# Altium PCB linkit-v4-0.3_6layers_kimonly.PcbDoc (part 3 of 5)
Units mm, origin at the board's own origin, x right, y up, seen from the top; angles counter-clockwise.
Board outline 70 x 35 mm, 6 copper layers (Top Layer, Int1 (GND), Int2 (Sign), Int3 (Sign), Int4 (PWR), Bottom Layer), stack 1.636 mm thick; 194 components, 149 nets, 738 pads, 717 vias.
Unrouted connection lines stored in the file: 1.
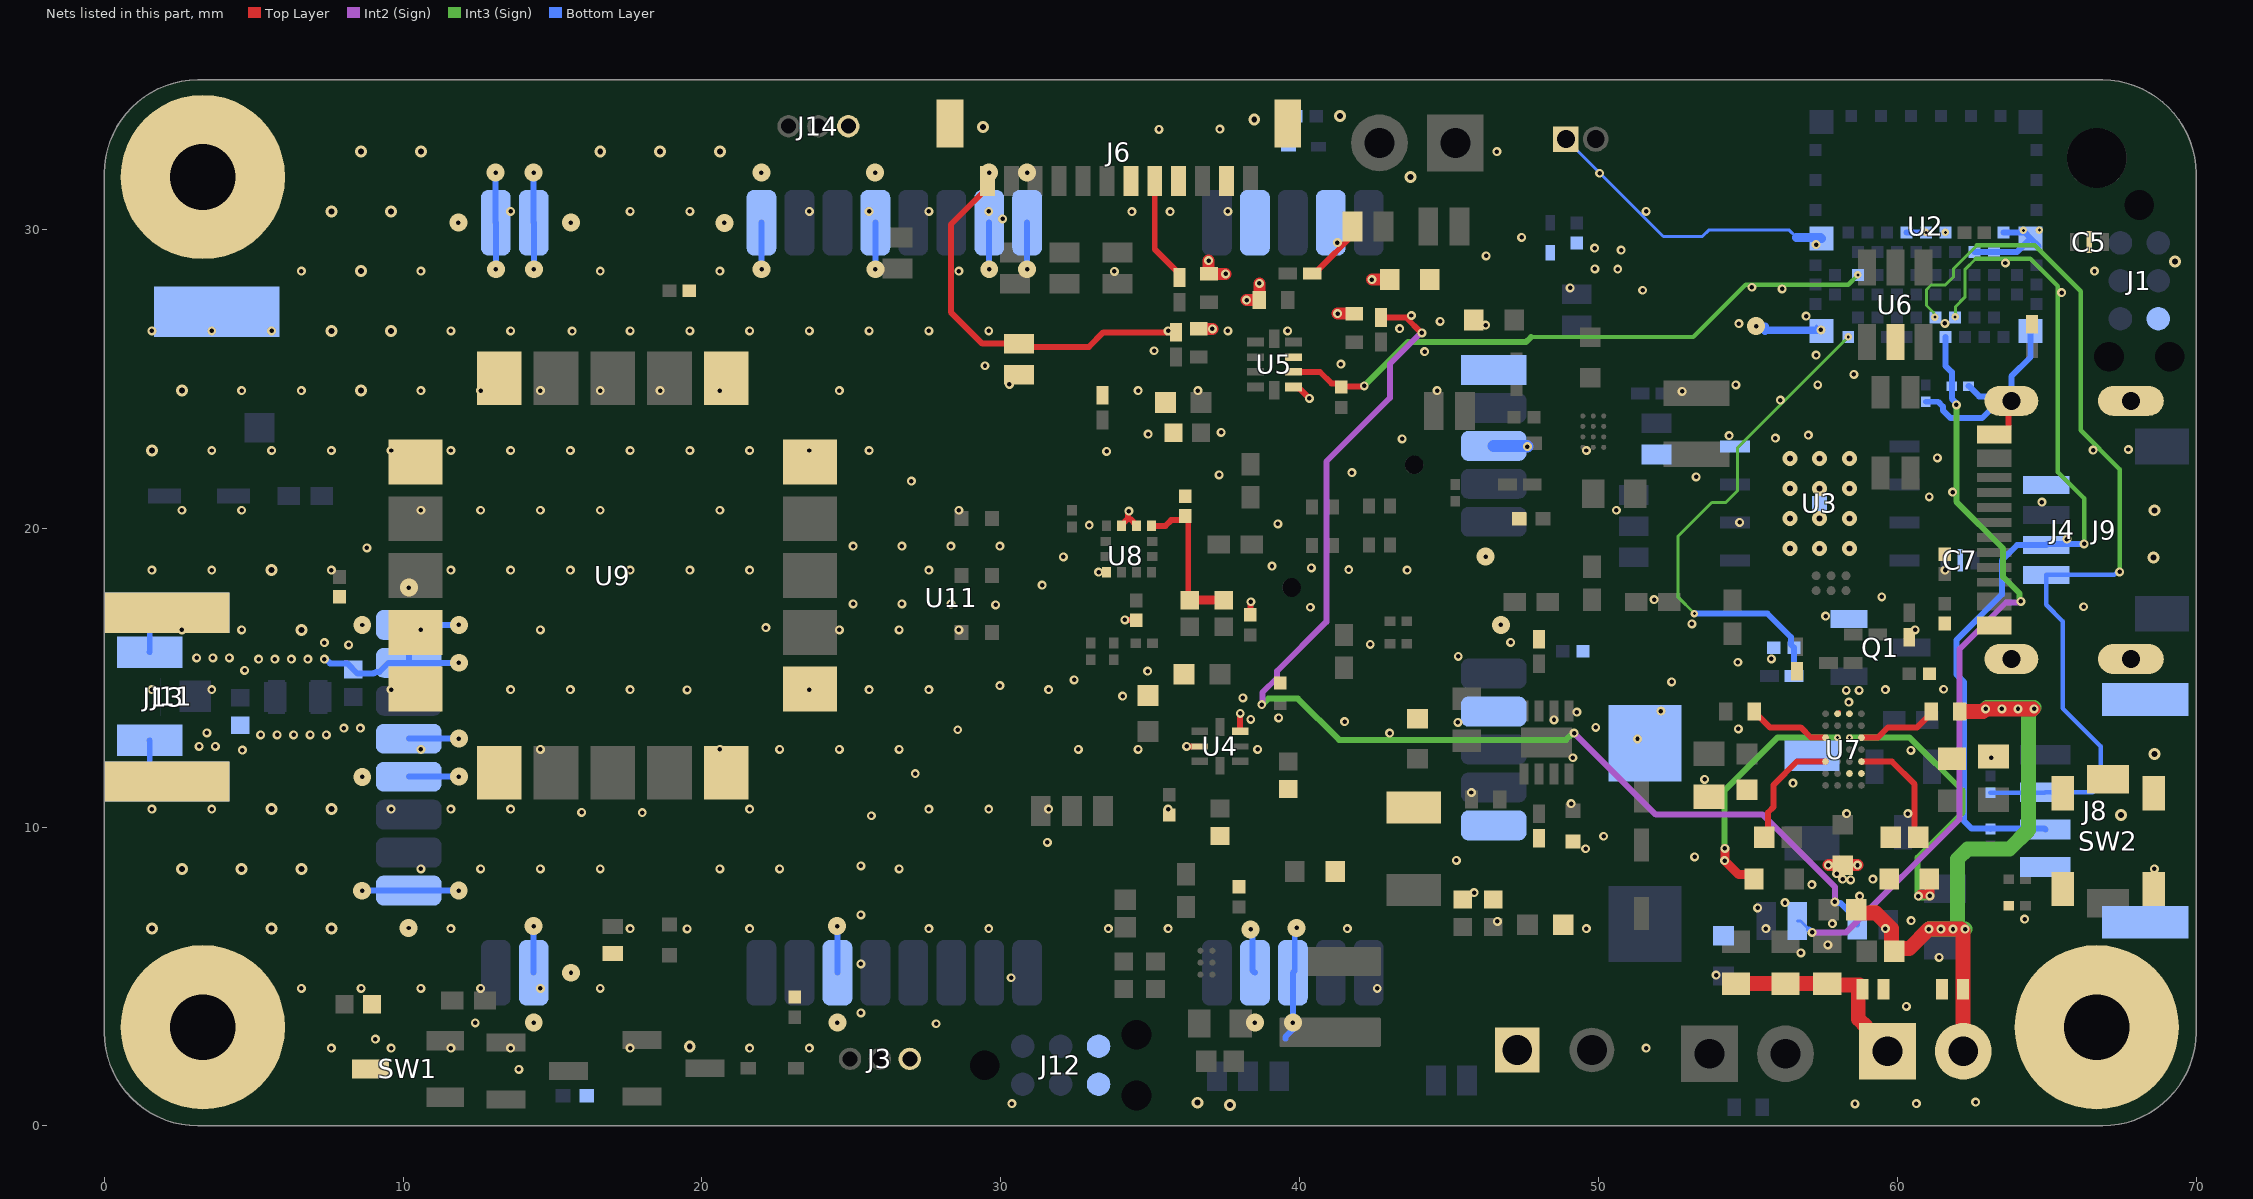
[diagram p6: the nets of this part, all layers, seen from the top]

## Part data (continued)
R26: library part RES-NC-0402, "Generic Resistor, Not Fitted", Manufacturer=YAGEO, Manufacturer_Part_Number=RC0402JR-070RL, Package=R0402, ComponentLink1Description=Datasheet, ComponentLink1URL=http://tunmcdsvn.tun.st.com/Component_Datasheet_Library/Trunk/Resistors/Yageo_Resistor_RC0402-series, Initial_Board_Reference=MB1274, Internal_Part_Number=MCD-00052, part_type=Resistor, Provided_By=SUBCO, status=Released
R31: library part "RES 0R 0402", "RES 0R 0402", Supplier Part Number 1=603-RC0402JR-070RL, Size=0402, Supplier 1=Mouser, Supplier 2=Digi-Key, Supplier Part Number 2=311-0.0JRCT-ND
R33 R34: "Thick Film Resistors - SMD 1/20watt 5.1Kohms 5% 200ppm", Manufacturer_Name=Vishay, Mouser Part Number=71-CRCW02015K10JNED, Datasheet Link=http://www.vishay.com/docs/20035/dcrcwe3.pdf, Height=0.28mm, Manufacturer_Part_Number=CRCW02015K10JNED, Mouser Price/Stock=https://www.mouser.com/Search/Refine.aspx?Keyword=71-CRCW02015K10JNED
R35: library part CRCW04020000Z0EEHP, "Thick Film Resistors - SMD CRCW 402 jumper", Manufacturer_Name=Vishay, Mouser Part Number=71-CRCW04020000Z0EEH, Arrow Part Number=CRCW04020000Z0EEHP, Arrow Price/Stock=https://www.arrow.com/en/products/crcw04020000z0eehp/vishay?utm_currency=USD&region=nac, Datasheet Link=http://www.vishay.com/docs/20035/dcrcwe3.pdf, Height=0.4mm, Manufacturer_Part_Number=CRCW04020000Z0EEHP, Mouser Price/Stock=https://www.mouser.co.uk/ProductDetail/Vishay-Dale/CRCW04020000Z0EEHP?qs=Imq1NPwxi74NTc567q7flQ%3D%3D
R36: "Res Thick Film 0201 453 Ohm 1% 1/20W ±100ppm/°C Molded SMD SMD Paper T/R", Case Code (Imperial)=0201, Case Code (Metric)=0603, Manufacturer="Vishay Dale", Manufacturer Part Number=CRCW0201453RFKED, Manufacturer_Name=Vishay, Max Operating Temperature=155°C, Max Power Dissipation=50mW, Min Operating Temperature=-55°C, Mouser Part Number=71-CRCW020120K0FKED, Package Quantity=10000, Supplier Part Number=71-CRCW0201453RFKED, Temperature Coefficient=100ppm/°C, TOLERANCE=1%, Voltage Rating=30V, Arrow Part Number=CRCW020120K0FKED, Arrow Price/Stock=https://www.arrow.com/en/products/crcw020120k0fked/vishay, Case/Package=0201, Category="Chip SMD Resistors", ComponentLink1Description=https://datasheet.ciiva.com/8935/crcw0201e3-8935846.pdf?src-supplier=Avnet, ComponentLink1URL=https://datasheet.ciiva.com/8935/crcw0201e3-8935846.pdf?src-supplier=Avnet, ComponentLink2Description=https://datasheet.ciiva.com/2580/crcw0201e3-2580478.pdf?src-supplier=Digikey, ComponentLink2URL=https://datasheet.ciiva.com/2580/crcw0201e3-2580478.pdf?src-supplier=Digikey, Contact Plating=Tin, Datasheet Link=http://www.vishay.com/docs/20035/dcrcwe3.pdf, Height=0.28mm, Lead Free="Lead Free", Length=0.024inch, Manufacturer_Part_Number=CRCW020120K0FKED, Mouser Price/Stock=https://www.mouser.co.uk/ProductDetail/Vishay-Dale/CRCW020120K0FKED?qs=1%252BOKmYoxJmkUY7PW7c9G2g%3D%3D, Number of Terminations=2, Packaging="Tape and Reel", Power Rating=50mW, Pricing="1=0,21, 10=0,091, 50=0,091, 100=0,063, 1000=0,043, 10000=0,029 (USD)", Radiation Hardening=No, RoHS=Yes, RoHS Compliant=Yes, Series=CRCW, Stock=8250, SUPPLIER=Mouser, Termination=SMD/SMT, Voltage Rating (DC)=30V, Weight=6E-06oz, Width=0.3mm
R37: "Thick Film Resistors - SMD 10 kOhms 50 mW 0201 1%", Manufacturer_Name=KEMET, Mouser Part Number=603-RC0201FR-7D10KL, Datasheet Link=http://www.yageo.com/documents/recent/PYu-RC0201_51_RoHS_L_8.pdf, Height=0.26mm, Manufacturer_Part_Number=RC0201FR-7D10KL, Mouser Price/Stock=https://www.mouser.co.uk/ProductDetail/YAGEO/RC0201FR-7D10KL?qs=F5EMLAvA7ICAEt2%2Fo%2FBSlA%3D%3D
R38: "Thick Film Resistors - SMD 0201 255ohm 1% HalogenFree AEC-Q200", Manufacturer_Name=Panasonic, Datasheet Link=https://industrial.panasonic.com/cdbs/www-data/pdf/RDA0000/AOA0000C301.pdf, Height=0.26mm, Manufacturer_Part_Number=ERJ-1GNF2550C
R39: "Thick Film Resistors - SMD 1/20watt 196ohms 1% 100ppm"
R40 R42: "Thick Film Resistors - SMD 1/20watt 470ohms 1% 200ppm", Manufacturer_Name=Panasonic, Mouser Part Number=667-ERJ-U02F4700X, Datasheet Link=https://industrial.panasonic.com/cdbs/www-data/pdf/RDP0000/AOA0000C334.pdf, Height=0.4mm, Manufacturer_Part_Number=ERJ-U02F4700X, Mouser Price/Stock=https://www.mouser.co.uk/ProductDetail/Panasonic/ERJ-U02F4700X?qs=CBysBIMljtjEviQOZxHkmQ%3D%3D
R41: "Thick Film Resistors - SMD 1/16watt 3.3Kohms 1% 100ppm", Manufacturer_Name=Vishay, Mouser Part Number=71-CRCW0402-3.3K-E3, Arrow Part Number=CRCW04023K30FKED, Arrow Price/Stock=https://www.arrow.com/en/products/crcw04023k30fked/vishay, Datasheet Link=http://www.vishay.com/docs/20035/dcrcwe3.pdf, Height=0.4mm, Manufacturer_Part_Number=CRCW04023K30FKED, Mouser Price/Stock=https://www.mouser.co.uk/ProductDetail/Vishay-Dale/CRCW04023K30FKED?qs=iv%252Be0Bc5VY2uvlCcTQHBWQ%3D%3D
R43 R44: "Thick Film Resistors - SMD 1/20watt 22ohms 1% 200ppm", Manufacturer_Name=Panasonic, Datasheet Link=https://industrial.panasonic.com/cdbs/www-data/pdf/RDP0000/AOA0000C334.pdf, Height=0.4mm, Manufacturer_Part_Number=ERJ-U02F22R0X
R45: "Thick Film Resistors - SMD 36.5Kohm 1% 200ppm", Manufacturer_Name=Vishay, Datasheet Link=http://www.vishay.com/docs/20035/dcrcwe3.pdf, Height=0.28mm, Manufacturer_Part_Number=CRCW020136K5FNED
R46: "Thick Film Resistors - SMD 0 Ohms 50mW 0201 1%", Manufacturer_Name=KEMET, Mouser Part Number=603-RC0201FR-070RL, Arrow Part Number=RC0201FR-070RL, Arrow Price/Stock=https://www.arrow.com/en/products/rc0201fr-070rl/yageo?region=nac, Datasheet Link=http://www.yageo.com/documents/recent/PYu-RC0201_51_RoHS_L_8.pdf, Height=0.26mm, Manufacturer_Part_Number=RC0201FR-070RL, Mouser Price/Stock=https://www.mouser.co.uk/ProductDetail/YAGEO/RC0201FR-070RL?qs=LWWr1WFOkdETHfAClQk8Xg%3D%3D
R47: "Thick Film Resistors - SMD 1/20W 2.74Kohms 1% 200ppm", Manufacturer_Name=Vishay, Datasheet Link=http://www.vishay.com/docs/20035/dcrcwe3.pdf, Height=0.28mm, Manufacturer_Part_Number=CRCW02012K74FNED
R48 R63: "Thick Film Resistors - SMD 1/20watt 100Kohms 5% 200ppm", Manufacturer_Name=Vishay, Mouser Part Number=71-CRCW0201100KJNED, Arrow Part Number=CRCW0201100KJNED, Arrow Price/Stock=https://www.arrow.com/en/products/crcw0201100kjned/vishay, Datasheet Link=http://www.vishay.com/docs/20035/dcrcwe3.pdf, Height=0.28mm, Manufacturer_Part_Number=CRCW0201100KJNED, Mouser Price/Stock=https://www.mouser.co.uk/ProductDetail/Vishay-Dale/CRCW0201100KJNED?qs=IQLUlsvFoXu8A8gHIw6owA%3D%3D
R49 R50: "Thick Film Resistors - SMD 1/16watt 49.9Kohms 1%", Manufacturer_Name=Vishay, Mouser Part Number=71-CRCW0402-49.9K-E3, Arrow Part Number=CRCW040249K9FKED, Arrow Price/Stock=https://www.arrow.com/en/products/crcw040249k9fked/vishay?region=nac, Datasheet Link=http://www.vishay.com/docs/20035/dcrcwe3.pdf, Height=0.4mm, Manufacturer_Part_Number=CRCW040249K9FKED, Mouser Price/Stock=https://www.mouser.co.uk/ProductDetail/Vishay-Dale/CRCW040249K9FKED?qs=hAuyw6LW%252BLhwjtjsHx%2FGDQ%3D%3D
R52 R53 R55: "Thick Film Resistors - SMD CRCW 402 jumper", Manufacturer_Name=Vishay, Mouser Part Number=71-CRCW04020000Z0EEH, Arrow Part Number=CRCW04020000Z0EEHP, Arrow Price/Stock=https://www.arrow.com/en/products/crcw04020000z0eehp/vishay?utm_currency=USD&region=nac, Datasheet Link=http://www.vishay.com/docs/20035/dcrcwe3.pdf, Height=0.4mm, Manufacturer_Part_Number=CRCW04020000Z0EEHP, Mouser Price/Stock=https://www.mouser.co.uk/ProductDetail/Vishay-Dale/CRCW04020000Z0EEHP?qs=Imq1NPwxi74NTc567q7flQ%3D%3D
R58: "Thick Film Resistors - SMD 10 MOhms 50mW 0201 1%", Manufacturer_Name=KEMET, Mouser Part Number=603-RC0201FR-0710ML, Arrow Part Number=RC0201FR-0710ML, Arrow Price/Stock=https://www.arrow.com/en/products/rc0201fr-0710ml/yageo, Datasheet Link=http://www.yageo.com/documents/recent/PYu-RC0201_51_RoHS_L_8.pdf, Height=0.26mm, Manufacturer_Part_Number=RC0201FR-0710ML, Mouser Price/Stock=https://www.mouser.com/Search/Refine.aspx?Keyword=603-RC0201FR-0710ML
SW1: "Board Mount Hall Effect/Magnetic Sensors Integrated Digital Omnipolar, TMR, High Sensitivity Magnetic Switch, SOT23 Package, Ind Temp, 2Hz", Manufacturer_Name="Allegro MicroSystems", Mouser Part Number=462-CT8132BV-IS3, Datasheet Link=https://www.mouser.fr/datasheet/2/1115/Allegro_DS_CT813x_Datasheet_GS_FINAL_R2_v2-3441103.pdf, Height=1.4mm, Manufacturer_Part_Number=CT8132BV-IS3, Mouser Price/Stock=https://www.mouser.fr/ProductDetail/Allegro-MicroSystems/CT8132BV-IS3?qs=GBLSl2Akirsc7cUAudCqXg%3D%3D
SW2: "SW SPST PB 50MA 12V SMT CK variant", Manufacturer=C&K, Manufacturers Part Number="PTS820J2xM SMTR LFS", Supplier Part Number 1=611-PTS820J25MSMTR, Distributor 1=EBV, Distributor 2="Future Electronics", Supplier 1=Mouser, Supplier 2=Digi-Key, Supplier Part Number 2=CKN10505CT-ND
U1: "Battery Management 800-mA linear batter y charger for one-ce", Manufacturer_Name="Texas Instruments", Mouser Part Number=595-BQ25176MDSGR, Arrow Part Number=BQ25176MDSGR, Arrow Price/Stock=https://www.arrow.com/en/products/bq25176mdsgr/texas-instruments?region=nac, Datasheet Link=https://www.ti.com/lit/gpn/bq25176m, Height=0.8mm, Manufacturer_Part_Number=BQ25176MDSGR, Mouser Price/Stock=https://www.mouser.co.uk/ProductDetail/Texas-Instruments/BQ25176MDSGR?qs=Y0Uzf4wQF3nVhcdITj52nA%3D%3D
U2: "IC ISP Smart Bluetooth Module", Manufacturer=InsightSIP, Manufacturers Part Number=ISP1807-LR-ST, Temp Max=85, Temp Min=-40, Supplier 1=Rutronik, Supplier 2=Mouser, Supplier Part Number 1=ISP1807-LR-ST, Supplier Part Number 2=359-ISP1807-LR-ST, Supplier Unit Price 1=8.5
U3: "IC MEM SERIAL NOR FLASH QSPI 128Mb/16MB 3.6V 166MHz WSON8 6X5", Manufacturer=ISSI, Supplier Part Number 1=2901145, Temp Max=105, Temp Min=-40, Distributor 1=EBV, Distributor 2="Future Electronics", Manufacturers Part Number=IS25LP128F-JKLE, Supplier 1=Farnell, Supplier 2=Mouser, Supplier Part Number 2=870-IS25LP128FJKLETR
U4: "Power Switch ICs - Power Distribution Low Input VTG Dual L oad Switch", Manufacturer_Name="Texas Instruments", Mouser Part Number=595-TPS22960RSER, Arrow Part Number=TPS22960RSER, Arrow Price/Stock=https://www.arrow.com/en/products/tps22960rser/texas-instruments?region=nac, Datasheet Link=https://www.ti.com/lit/ds/symlink/tps22960.pdf?ts=1638681846865&ref_url=https%253A%252F%252Fwww.google.com%252F, Height=0.6mm, Manufacturer_Part_Number=TPS22960RSER, Mouser Price/Stock=https://www.mouser.co.uk/ProductDetail/Texas-Instruments/TPS22960RSER?qs=EQxOuqCyzqQpKHLEcq5RSg%3D%3D
U5: "Analog to Digital Converters - ADC 16B ADC w/ Int MUX P GA Comp Osc & Ref A", Manufacturer_Name="Texas Instruments", Mouser Part Number=595-ADS1115IRUGR, Arrow Part Number=ADS1115IRUGR, Arrow Price/Stock=https://www.arrow.com/en/products/ads1115irugr/texas-instruments?utm_currency=USD&region=nac, Datasheet Link=https://www.ti.com/lit/ds/symlink/ads1115.pdf?ts=1601235703022&ref_url=https%253A%252F%252Fwww.ti.com%252Fproduct%252FADS1115%253FkeyMatch%253DADS1115IRUGR%2526tisearch%253DSearch-EN-everything%2526usecase%253DOPN, Height=0.4mm, Manufacturer_Part_Number=ADS1115IRUGR, Mouser Price/Stock=https://www.mouser.co.uk/ProductDetail/Texas-Instruments/ADS1115IRUGR?qs=IK5e5L0zOXhqw%2F8AHSSbuA%3D%3D
U6: "ESD Suppressors / TVS Diodes High Speed Interface Protection Low Cap", Manufacturer_Name=STMicroelectronics, Mouser Part Number=511-USBLC6-2SC6, Arrow Part Number=USBLC6-2SC6, Arrow Price/Stock=https://www.arrow.com/en/products/usblc6-2sc6/stmicroelectronics?utm_currency=USD&region=europe, Datasheet Link=http://www.st.com/st-web-ui/static/active/en/resource/technical/document/datasheet/CD00050750.pdf, Height=1.45mm, Manufacturer_Part_Number=USBLC6-2SC6, Mouser Price/Stock=https://www.mouser.co.uk/ProductDetail/STMicroelectronics/USBLC6-2SC6?qs=po45yt2pPpu%2FhNIlwQdTlg%3D%3D
U7: "Wireless Charging ICs Wireless Pwr Receivr A 595-BQ51003YFPR", Manufacturer_Name="Texas Instruments", Mouser Part Number=595-BQ51003YFPT, Arrow Part Number=BQ51003YFPT, Arrow Price/Stock=https://www.arrow.com/en/products/bq51003yfpt/texas-instruments?region=nac, Datasheet Link=http://www.ti.com/lit/gpn/BQ51003, Height=0.5mm, Manufacturer_Part_Number=BQ51003YFPT, Mouser Price/Stock=https://www.mouser.co.uk/ProductDetail/Texas-Instruments/BQ51003YFPT?qs=QCUnHQQYO1rX6GZ4rUhwCg%3D%3D
U8: "IC AXL Accel/temp SPI/I2C 12LGA", Manufacturer="Bosch Sensortec", Supplier Part Number 1=828-1081-1-ND, Temp Max=85, Temp Min=-40, Manufacturers Part Number=BMA400, Supplier 1=Digi-Key, Supplier 2=Mouser, Supplier Part Number 2=262-BMA400
U9: "GNSS / GPS Modules u-blox M10 GNSS antenna module ROM, TCXO, SAW, LNA LGA, 16x16 mm", Manufacturer_Name=U-Blox, Mouser Part Number=377-SAM-M10Q-00B, Datasheet Link=https://content.u-blox.com/sites/default/files/documents/SAM-M10Q_DataSheet_UBX-22013293.pdf, Height=6.8mm, Manufacturer_Part_Number=SAM-M10Q-00B, Mouser Price/Stock=https://www.mouser.co.uk/ProductDetail/u-blox/SAM-M10Q-00B?qs=vvQtp7zwQdOaA6LplTUKjg%3D%3D
U10: "Switching Voltage Regulators 5.5-V buck-boost con verter with 75-nA op", Manufacturer_Name="Texas Instruments", Mouser Part Number=595-TPS63901YCJR, Arrow Part Number=TPS63901YCJR, Arrow Price/Stock=https://www.arrow.com/en/products/tps63901ycjr/texas-instruments?region=nac, Datasheet Link=https://www.ti.com/lit/ds/symlink/tps63901.pdf?ts=1658737279065&ref_url=https%253A%252F%252Fwww.ti.com%252Fproduct%252FTPS63901%253FkeyMatch%253DTPS63901YCJR%2526tisearch%253Dsearch-everything%2526usecase%253DOPN, Height=0.35mm, Manufacturer_Part_Number=TPS63901YCJR, Mouser Price/Stock=https://www.mouser.co.uk/ProductDetail/Texas-Instruments/TPS63901YCJR?qs=vvQtp7zwQdNZy3FE2e2hqg%3D%3D
U11: "KIM2 Module 48 pins 1.27mm pitch 36.6 x 25.4 x 5mm", Manufacturer=Kineis, Rating=3.3-5V, TOLERANCE="-30 /  +55°C", BOI="SMD48 36.6x25.4x5mm", DESIG="KIMFLEX Module 48 pins 1.27mm pitch 36.6 x 25.4 x 5mm", K P/N=-, Manufacturer P/N=KIM2, SUPPLIER=Kineis, Supplier P/N=KIMFLEX, VAL=KIM2
U14: "Switching Voltage Regulators 95-nA low IQ 5.5-V b oost converter with INLIMIT (1.9A)", Manufacturer_Name="Texas Instruments", Mouser Part Number=595-TPS612997YBHR, Arrow Part Number=TPS612997YBHR, Arrow Price/Stock=https://www.arrow.com/en/products/tps612997ybhr/texas-instruments?utm_currency=USD&region=nac, Datasheet Link=https://www.ti.com/lit/gpn/tps61299, Height=0.4mm, Manufacturer_Part_Number=TPS612997YBHR, Mouser Price/Stock=https://www.mouser.co.uk/ProductDetail/Texas-Instruments/TPS612997YBHR?qs=mELouGlnn3dLhnQxUdz5hw%3D%3D

## Via types
v1: diameter 0.3, hole 0.15, Int1 (GND) to Int3 (Sign), tented both sides, 165 vias
v2: diameter 0.3, hole 0.15, Top Layer to Int1 (GND), tented both sides, 113 vias
v3: diameter 0.3, hole 0.15, Top Layer to Int4 (PWR), tented both sides, 69 vias
v4: diameter 0.3, hole 0.15, Top Layer to Int3 (Sign), tented both sides, 64 vias
v5: diameter 0.3, hole 0.15, Int1 (GND) to Int2 (Sign), tented both sides, 39 vias
v6: diameter 0.6, hole 0.15, Int1 (GND) to Bottom Layer, tented both sides, 35 vias
v7: diameter 0.4/0.4/0.4/0.4 (per signal layer), hole 0.2, Top Layer to Bottom Layer, tented both sides, 31 vias
v8: diameter 0.3, hole 0.15, Int1 (GND) to Bottom Layer, tented both sides, 28 vias
v9: diameter 0.3, hole 0.15, Top Layer to Int2 (Sign), tented both sides, 21 vias
v10: diameter 0.3, hole 0.15, Int3 (Sign) to Bottom Layer, tented both sides, 20 vias
v11: diameter 0.3, hole 0.15, Int2 (Sign) to Int3 (Sign), tented both sides, 18 vias
v12: diameter 0.3, hole 0.15, Int4 (PWR) to Bottom Layer, tented both sides, 16 vias
v13: diameter 0.3, hole 0.15, Int2 (Sign) to Bottom Layer, tented both sides, 15 vias
v14: diameter 0.25, hole 0.1, Int3 (Sign) to Bottom Layer, tented both sides, 15 vias
v15: diameter 0.5, hole 0.2, Top Layer to Bottom Layer, tented both sides, 12 vias
v16: diameter 0.25, hole 0.1, Int2 (Sign) to Bottom Layer, tented both sides, 12 vias
v17: diameter 0.25, hole 0.1, Top Layer to Bottom Layer, tented both sides, 8 vias
v18: diameter 0.2, hole 0.1, Int2 (Sign) to Bottom Layer, tented both sides, 7 vias
v19: diameter 0.226, hole 0.1, Top Layer to Int3 (Sign), tented both sides, 6 vias
v20: diameter 0.4, hole 0.2, Top Layer to Bottom Layer, tented both sides, 6 vias
v21: diameter 0.6, hole 0.3, Top Layer to Bottom Layer, tented both sides, 4 vias
v22: diameter 0.25, hole 0.1, Int1 (GND) to Bottom Layer, tented both sides, 4 vias
v23: diameter 0.6, hole 0.15, Top Layer to Int2 (Sign), tented both sides, 2 vias
v24: diameter 0.6, hole 0.15, Int3 (Sign) to Bottom Layer, tented both sides, 2 vias
v25: diameter 0.3, hole 0.15, Top Layer to Bottom Layer, tented both sides, 2 vias
v26: diameter 0.6, hole 0.15, Int4 (PWR) to Bottom Layer, tented both sides, 1 vias
v27: diameter 0.25, hole 0.1, Int2 (Sign) to Int3 (Sign), tented both sides, 1 vias
v28: diameter 0.169, hole 0.1, Top Layer to Int2 (Sign), tented both sides, 1 vias

## Nets (pads, with @x,y where several pads share a name; then routed paths per layer and width w, separated by ;. In a path a pad name is that pad's centre, name@x,y a point inside that pad or via, vN(x,y) a via of type N, cw(c..) or ccw(c..) an arc to the next point about the centre after c; other vN are vias at no path point)
ADC0: O7.2 R27.1 | length 40
  Top Layer w0.2: R27.1@42.718,27.052 43.56,27.052 44.077,26.535 v9(44.09,26.535)
  Int2 (Sign) w0.2: v11(38.735,14.097) 38.754,14.116 38.754,14.5 39.243,14.989 39.243,15.216 40.894,16.867 40.894,22.232 43.019,24.357 43.019,25.493 44.061,26.535 v9(44.09,26.535) ; v11(49.19,13.144) 51.92,10.414 55.497,10.414 57.912,7.999 v13(57.912,7.493)
  Int3 (Sign) w0.2: v11(38.735,14.097) 38.75,14.097 38.952,14.299 39.942,14.299 41.322,12.919 48.911,12.919 49.136,13.144 v11(49.19,13.144)
  Bottom Layer w0.2: v13(57.912,7.493) 57.95,7.455 58.107,7.455 58.661,6.901 O7.2@58.661,6.731
ADC1: O8.2 R30.1 | length 2.2
  Top Layer w0.2: R30.1@40.428,28.522 40.541,28.522 40.641,28.622 40.641,28.664 41.77,29.794 O8.2@41.77,30.099
ADC2: J6.5 R32.1 | length 3.6
  Top Layer w0.2: J6.5@35.154,31.623 35.154,29.332 35.987,28.499 R32.1@35.987,28.387
ADC3: J6.12 O13.2 R51.1 | length 13.1
  Top Layer w0.2: J6.12@29.554,31.623 29.554,31.373 29.404,31.223 29.392,31.223 28.33,30.161 28.33,27.229 29.384,26.175 O13.2@30.607,26.175 30.712,26.07 32.954,26.07 33.436,26.552 R51.1@35.864,26.552
ADC_ALERT_RDY: R28.2 U2.64 U5.2 | length 20.7
  Top Layer w0.2: U5.2@39.797,25.228 40.685,25.228 41.069,24.844 41.292,24.844 R28.2@41.402,24.734 ; R28.2@41.402,24.724 R28.2@41.402,24.734 ; v4(42.164,24.765) 42.143,24.744 41.413,24.744 R28.2@41.402,24.734
  Int3 (Sign) w0.15: 47.747,26.398 53.173,26.398 54.924,28.149 58.36,28.149 v14(58.685,28.474)
  Int3 (Sign) w0.2: v4(42.164,24.765) 43.622,26.223 47.572,26.223 47.747,26.398
AGND: C14.2 C15.2 C16.2 C57.2 FB1.1 | length 3.6
  Top Layer w0.4: C57.2@36.626,26.678 36.634,26.67 v2(37.084,26.67) ; v2(36.957,28.956) 36.957,28.523 C16.2@36.967,28.513 v2(37.524,28.513) ; v2(38.227,27.633) C15.2@38.654,27.633 v2(38.654,28.194) ; v2(41.275,27.178) C14.2@41.829,27.178 ; v2(42.418,28.321) FB1.1@43.013,28.321
BAT_AN: C4.2 O5.2 U2.38 | length 25.4
  Int2 (Sign) w0.2: v13(57.15,6.477) 58.293,6.477 62.086,10.27 62.086,15.959 63.64,17.513 64.095,17.513 v11(64.133,17.551)
  Int3 (Sign) w0.2: v10(61.976,24.13) 61.976,20.886 63.541,19.321 63.541,18.367 64.095,17.813 64.095,17.589 v11(64.133,17.551)
  Bottom Layer w0.1: O5.2@56.655,6.858 56.769,6.858 v13@57.047,6.58
  Bottom Layer w0.2: v13@57.047,6.58 v13(57.15,6.477) ; U2.38@61.61,26.399 61.61,25.436 61.824,25.222 C4.2@61.824,24.752 61.824,24.336 61.976,24.184 v10(61.976,24.13)
BAT_READ_EN: R3.2 R22.2 U2.48 | length 17
  Int3 (Sign) w0.1: v14(53.213,17.145) 52.655,17.703 52.655,19.722 53.794,20.861 54.262,20.861 54.65,21.249 54.65,22.689 57.706,25.745 v14(58.36,26.399)
  Bottom Layer w0.2: v14(53.213,17.145) 55.654,17.145 56.44,16.359 56.44,16.108 R22.2@56.546,16.002 R3.2@56.546,15.047
BMA_PWR: C37.2 R29.1 R31.2 U8.7 | length 5.4
  Top Layer w0.2: U8.7@35.04,20.079 35.515,20.079 35.705,20.269 36.015,20.269 36.025,20.279 36.069,20.279 C37.2@36.147,20.357 ; C37.2@36.137,20.367 C37.2@36.147,20.357 ; C37.2@36.179,20.409 C37.2@36.179,20.389 ; R29.1@36.234,17.683 R29.1@36.275,17.642 ; R29.1@36.322,17.595 R29.1@36.275,17.642 ; C37.2@36.147,20.357 C37.2@36.179,20.389 ; C37.2@36.147,20.357 C37.2@36.179,20.325 ; C37.2@36.179,20.325 36.275,20.229 R29.1@36.275,17.642 ; C37.2@36.179,20.325 C37.2@36.179,20.389
  Top Layer w0.3: R29.1@36.322,17.595 R31.2@37.465,17.595
BOOT1: C29.2 U7.C4 | length 4
  Top Layer w0.2: C29.2@55.547,9.652 55.674,9.779 55.674,10.487 55.865,10.678 55.865,11.415 56.642,12.192 U7.C4@57.601,12.192
BOOT2: C34.2 U7.C1 | length 4.1
  Top Layer w0.2: U7.C1@58.801,12.192 59.817,12.192 60.582,11.427 C34.2@60.582,9.438
CLAMP1: C23.2 U7.E3 | length 8.5
  Top Layer w0.3: v4(54.234,9.285) 54.23,9.28 54.23,8.884 v4(54.226,8.879) 54.697,8.408 55.052,8.408 C23.2@55.205,8.255
  Int3 (Sign) w0.2: v4(54.226,8.879) 54.226,11.23 55.988,12.992 v19(58.001,12.992)
CLAMP2: C36.2 U7.E2 | length 10.1
  Top Layer w0.2: C36.2@61.076,8.255 C36.2@61.09,8.241
  Top Layer w0.3: v4(60.706,7.688) 60.779,7.761 61.028,7.761 v4(61.09,7.698) 61.09,7.827 C36.2@61.09,8.241
  Int3 (Sign) w0.2: v19(58.401,12.992) 60.414,12.992 62.184,11.222 62.184,10.48 60.679,8.975 60.679,7.742 60.706,7.715 v4(60.706,7.688) v4@60.712,7.693 ; v4@61.085,7.693 v4(61.09,7.698)
  Int3 (Sign) w0.3: v4@60.712,7.693 v4@61.085,7.693
COIL-1: C24.1 C28.1 C43.1 D9.1 J7.1 | length 6.3
  Top Layer w0.5: C43.1@54.61,4.761 C24.1@56.261,4.761 C28.1@57.277,4.761 ; C28.1@57.658,4.761 57.702,4.717 D9.1@58.737,4.717 ; D9.1@58.695,4.599 58.695,3.581 58.97,3.307 58.97,3.199 J7.1@59.67,2.499
COIL-2: C32.1 C33.1 C34.1 C35.1 C36.1 D10.1 J7.2 U7.B1 U7.B2 | length 23.4
  Top Layer w0.5: C32.1@58.626,7.239 58.626,7.224 58.721,7.129 59.282,7.129 59.801,6.61 59.801,5.937 C33.1@59.896,5.842 59.912,5.826 59.912,5.853 59.991,5.932 60.401,5.932 v4(61.055,6.586) ; v4@61.18,6.594 v4@61.453,6.594 ; v4(61.46,6.586) v4(61.865,6.586) 62.142,6.586 62.193,6.535 D10.1@62.193,4.572 J7.2@62.193,2.515 ; C35.1@62.14,13.862 62.866,13.862 v4(62.96,13.956) v4(63.5,13.956) v4(64.04,13.956) v4@64.537,13.956
  Int3 (Sign) w0.5: v4(61.055,6.586) v4(61.46,6.586) 61.831,6.586 v4(61.865,6.586) ; v4(62.27,6.586) v4(61.865,6.586) ; v4@63.003,13.998 64.58,13.998 64.389,13.808 64.389,9.899 63.751,9.262 62.348,9.262 62.011,8.925 62.011,6.732 v4(61.865,6.586)
  other v4: 64.58,13.956
COMM1: C25.2 U7.E4 | length 2.7
  Top Layer w0.2: C25.2@55.212,13.862 55.739,13.335 56.769,13.335 57.112,12.992 U7.E4@57.601,12.992
COMM2: C35.2 U7.E1 | length 2.7
  Top Layer w0.2: U7.E1@58.801,12.992 59.347,12.992 59.69,13.335 60.663,13.335 C35.2@61.19,13.862
EXT_SCL: J8.2 J9.4 R62.2 U2.39 | length 31.6
  Int3 (Sign) w0.1: v14(61.261,27.06) 61.232,27.089 61.232,27.198 60.976,27.455 60.976,27.982 61.13,28.136 61.609,28.136 61.884,28.411 61.884,28.684 62.664,29.464
  Int3 (Sign) w0.15: 62.664,29.464 64.603,29.464 66.135,27.932 66.135,23.273 67.437,21.971 v10(67.437,18.542)
  Bottom Layer w0.15: R62.2@63.119,11.15 64.936,11.15 J8.2@64.952,11.166 66.538,11.166 66.802,11.43 66.802,12.7 65.532,13.97 65.532,16.891 64.987,17.436 J9.4@64.987,18.439 67.266,18.439 67.369,18.542 v10(67.437,18.542)
EXT_SDA: J8.3 J9.3 R61.1 U2.37 | length 29.6
  Int3 (Sign) w0.1: v14@61.954,27.093 61.954,27.419 62.259,27.724 62.259,28.65 62.632,29.023
  Int3 (Sign) w0.15: v14(61.935,27.074) v14@61.954,27.093 ; 62.632,29.023 64.449,29.023 65.376,28.096 65.376,21.873 66.249,21 v10(66.249,19.478)
  Bottom Layer w0.2: R61.1@63.106,9.945 62.492,9.945 62.238,10.198 62.238,14.851 61.976,15.113 61.976,16.256 63.5,17.78 63.5,18.923 64.008,19.431 64.979,19.431 J9.3@64.987,19.439 65.026,19.478 v10(66.249,19.478) ; R61.1@63.119,9.932 63.132,9.945 64.923,9.945 J8.3@64.952,9.916
GND: BT1.- C1.2 C3.1 C4.1 C5.3 C6.1 C7.3 C8.2 C9.1 C10.2 C11.1 C12.1 C13.2 C17.1 C18.1 C19.1 C20.2 C21.2 C22.2 C26.2 C27.2 C30.2 C31.2 C37.1 C38.1 C39.2 C40.1 C47.1 C49.1 C50.2 D7.2 D8.2 D9.2 D10.2 FB1.2 FB2.2 FB3.2 FB4.2 FB5.2 FB6.2 J1.5 J2.1 J3.1 J4.A1_B12 J4.B1_A12 J4.SHIELD J5.1 J6.2 J6.4 J6.6 J6.13 J6.14 J8.4 J8.MP1 J8.MP2 J9.1 J11.1 J11.2 J12.5 J12.6 J13.2 J14.1 MH2.1 MH3.1 MH4.1 O11.1 O13.1 Q1.2 R6.2 R7.1 R8.1 R10.1 R11.1 R12.1 R18.1 R19.1 R20.1 R21.1 R22.1 R26.1 R33.1 R34.1 R37.2 R39.2 R57.1 R58.1 R59.2 R60.2 R63.2 SW1.3 SW2.1 SW2.G1 SW2.G2 SW2.G3 SW2.G4 U2.1 U2.7 U2.14 U2.16 U2.18 U2.21 U2.23 U2.24 U2.25 U2.31 U3.4 U3.9 U4.3 U4.6 U5.1 U5.3 U6.2 U7.G2 U7.G3 U8.1 U8.8 U8.9 U9.1 U9.4 U9.5 U9.6 U9.10 U9.11 U9.15 U9.16 U9.20 U11.1@46.495,25.294 U11.3@46.495,22.754 U11.7@46.495,13.864 U11.10@46.495,10.054 U11.13@39.775,5.124 U11.14@38.505,5.124 U11.21@24.535,5.124 U11.24@14.375,5.124 U11.26@10.195,7.874 U11.29@10.195,11.684 U11.30@10.195,12.954 U11.32@10.195,15.494 U11.33@10.195,16.764 U11.34@13.105,30.224 U11.35@14.375,30.224 U11.36@21.995,30.224 U11.39@25.805,30.224 U11.42@29.615,30.224 U11.43@30.885,30.224 U11.45@38.505,30.224 U11.47@41.045,30.224 | length 70.8
  Top Layer w0.1: U7.G3@58.001,13.792 U7.G3@58.068,13.859
  Top Layer w0.192: U8.1@33.536,18.529 U8.1@33.54,18.529
  Top Layer w0.2: v2(33.274,18.529) U8.1@33.536,18.529 ; U8.9@34.04,20.079 34.04,20.104 34.252,20.316 34.252,20.536 v2(34.29,20.574) ; v2(34.157,16.936) 34.164,16.929 34.53,16.929 C38.1@34.537,16.922 ; 34.328,20.316 34.54,20.104 U8.8@34.54,20.079 ; v2(36.223,12.7) U4.6@36.663,12.7 ; U4.3@38.013,13.2 U4.3@38.013,13.2 38.014,13.805 v2(38.016,13.806) ; R18.1@38.354,17.104 38.361,17.111 38.361,17.532 v2(38.367,17.539) ; U5.1@39.797,24.728 39.935,24.728 39.999,24.664 40.009,24.664 v2(40.327,24.345) ; J4.B1_A12@63.243,23.141 63.518,23.141 63.718,23.341 63.718,24.161 J4.SHIELD@63.818,24.261
  Top Layer w0.4: v2(57.692,8.727) FB2.2@58.175,8.727 v2(58.669,8.727)
  Bottom Layer w0.1: J2.1@48.911,33.02 52.17,29.761 53.477,29.761 53.689,29.972 56.387,29.972 56.626,29.733 ; U2.1@57.297,26.762 U2.1@57.46,26.599
  Bottom Layer w0.2: J11.1@1.524,12.902 1.525,12.901 1.525,12.101 J13.2@2.1,11.526 ; J11.2@1.524,15.852 J11.2@1.524,15.852 1.525,16.601 J13.2@2.1,17.176 ; v8(7.366,15.621) 7.42,15.621 7.564,15.477 8.132,15.477 8.475,15.134 9.015,15.134 9.055,15.174 9.078,15.174 9.09,15.187 9.206,15.187 9.514,15.494 U11.32@10.195,15.494 U11.33@10.195,16.764 ; v6@8.635,7.871 U11.26@10.192,7.871 ; U11.26@10.195,7.874 v6(11.865,7.874) ; U11.29@10.198,11.687 v6(11.868,11.687) ; U11.30@10.198,12.957 v6(11.868,12.957) ; U11.32@10.198,15.497 v6(11.868,15.497) ; U11.33@10.198,16.767 v6(11.868,16.767) ; U11.34@13.102,30.227 v6(13.102,31.897) ; U11.34@13.105,30.224 13.106,30.222 13.106,28.665 v6(13.108,28.664) ; U11.24@14.372,5.127 v6@14.372,6.684 ; U11.35@14.372,30.227 v6(14.372,31.897) ; U11.35@14.375,30.224 14.376,30.222 14.376,28.665 v6(14.378,28.664) ; v6@21.995,28.667 U11.36@21.995,30.224 ; U11.21@24.532,5.127 v6@24.532,6.684 ; v6@25.805,28.667 U11.39@25.805,30.224 ; v6@29.615,28.667 U11.42@29.615,30.224 ; v6@30.885,28.667 U11.43@30.885,30.224 ; v6(38.36,6.575) 38.433,6.503 38.433,5.196 U11.14@38.502,5.127 ; 39.529,2.927 39.529,2.981 39.775,3.226 U11.13@39.775,5.124 39.839,5.188 39.839,6.56 v6(39.904,6.624) ; U11.3@46.484,22.744 U11.3@46.495,22.754 ; U2.14@60.31,29.899 v17(60.96,29.899) ; C3.1@60.96,24.231 61.367,24.231 61.526,24.072 61.526,23.944 61.79,23.68 62.837,23.68 63.418,24.261 J4.SHIELD@63.818,24.261 ; C4.1@62.384,24.752 62.404,24.752 62.742,24.414 63.665,24.414 J4.SHIELD@63.818,24.261 ; U2.21@62.585,29.249 U2.23@63.235,29.249 64.01,29.249 U2.25@64.46,29.699 ; U2.24@63.56,29.899 64.26,29.899 U2.25@64.46,29.699 ; U2.31@64.46,26.599 64.46,25.725 63.818,25.083 J4.SHIELD@63.818,24.261 ; U2.25@64.73,29.429 U2.25@64.46,29.699
  Bottom Layer w0.254: 55.575,26.599 55.412,26.762 v6(55.276,26.762) v6@55.575,26.762 ; 55.575,26.628 U2.1@57.431,26.628
  Bottom Layer w0.3: 56.626,29.733 57.425,29.733 U2.7@57.46,29.699
  Bottom Layer w0.4: U11.3@46.495,22.754 47.604,22.754 v10(47.625,22.733)
  other v1: 58.586,0.737 60.638,0.742 62.624,0.794 9.6,2.6 11.6,2.6 21.6,2.6 23.6,2.6 51.6,2.6 6.6,4.6 8.6,4.6 10.6,4.6 12.6,4.6 14.6,4.6 16.6,4.6 42.6,4.6 11.6,6.6 17.6,6.6 19.505,6.595 21.6,6.6 27.6,6.6 29.6,6.6 41.6,6.6 49.6,6.6 55.6,6.6 59.6,6.6 10.6,8.6 12.6,8.6 14.6,8.6 16.6,8.6 20.6,8.6 22.6,8.6 26.6,8.6 1.6,10.6 3.6,10.6 9.6,10.6 11.6,10.6 13.6,10.6 21.6,10.6 27.6,10.6 29.6,10.6 31.6,10.6 35.6,10.6 45.75,11.156 49.149,12.319 10.6,12.6 14.6,12.6 20.6,12.6 22.6,12.6 24.6,12.6 26.6,12.6 32.6,12.6 34.6,12.6 38.6,12.6 54.687,13.282 49.911,13.335 48.514,13.589 38.367,13.602 39.3,13.656 49.276,13.843 38.1,14.322 19.51,14.591 1.6,14.6 3.6,14.6 9.6,14.6 13.6,14.6 15.6,14.6 17.6,14.6 23.6,14.6 25.6,14.6 27.6,14.6 31.6,14.6 59.6,14.6 61.55,14.611 54.666,15.515 42.366,16.114 2.6,16.6 4.6,16.6 10.6,16.6 14.6,16.6 24.6,16.6 26.6,16.6 28.6,16.6 60.6,16.6 22.143,16.672 1.6,18.6 3.6,18.6 7.6,18.6 11.6,18.6 13.6,18.6 15.6,18.6 17.6,18.6 19.6,18.6 21.6,18.6 27.6,18.6 43.6,18.6 61.6,18.6 2.6,20.6 4.6,20.6 10.6,20.6 12.6,20.6 14.6,20.6 16.6,20.6 20.6,20.6 28.6,20.6 27.012,21.578 33.541,22.572 3.6,22.6 5.6,22.6 7.6,22.6 9.6,22.6 11.6,22.6 13.6,22.6 15.6,22.6 17.6,22.6 19.6,22.6 21.6,22.6 23.6,22.6 25.6,22.6 67.737,22.633 37.377,23.203 52.8,24.577 4.6,24.6 6.6,24.6 10.6,24.6 12.6,24.6 14.6,24.6 16.6,24.6 18.6,24.6 20.6,24.6 24.6,24.6 34.6,24.6 36.6,24.6 44.6,24.6 54.603,24.796 30.292,24.811 1.6,26.6 3.6,26.6 5.6,26.6 11.6,26.6 13.6,26.6 19.6,26.6 21.6,26.6 23.6,26.6 25.6,26.6 27.6,26.6 29.6,26.6 35.6,26.6 6.6,28.6 10.6,28.6 16.6,28.6 20.6,28.6 28.6,28.6 33.804,28.597 66.6,28.6 41.266,29.558 13.6,30.6 17.6,30.6 19.6,30.6 23.6,30.6 25.6,30.6 27.6,30.6 29.6,30.6 37.6,30.6 35.297,33.348 37.337,33.356
  other v2: 13.874,1.89 9.073,2.901 12.417,3.445 25.322,3.785 60.305,3.996 30.345,4.958 25.322,5.422 61.4,5.635 60.462,6.868 25.322,7.06 55.328,7.297 58.175,8.255 25.322,8.698 31.565,9.487 50.177,9.693 25.676,10.378 27.14,11.788 60.453,12.566 28.563,13.256 41.508,13.526 52.087,13.879 34.078,14.38 29.972,14.732 32.46,14.925 34.914,15.219 55.789,15.628 47.06,16.181 53.13,16.801 57.602,17.057 40.36,17.355 29.828,17.437 25.058,17.465 26.696,17.465 28.334,17.465 59.481,17.705 31.387,18.094 40.393,18.676 39.078,18.733 32.099,19.041 8.79,19.338 25.058,19.399 26.696,19.399 28.334,19.399 29.972,19.399 32.962,20.103 39.273,20.142 61.071,21.045 61.849,21.209 37.31,21.786 61.341,22.352 43.434,22.987 55.924,23.01 57.023,23.114 34.935,23.15 56.088,24.282 58.547,25.146 29.474,25.436 41.384,25.487 57.284,25.788 35.131,25.938 54.697,26.846 61.596,26.857 56.948,27.093 65.5,27.886 56.147,28.01 49.053,28.041 49.878,28.678 46.245,29.111 50.76,29.304 47.43,29.732 30.063,30.351 34.386,30.592 50.038,31.877
  other v4: 15.973,10.49 18.005,10.486 41.646,18.614 15.659,26.591 17.6,26.6 35.669,30.597
  other v5: 30.371,0.747 27.838,3.418 53.941,5.043 46.618,6.847 64.265,6.918 56.243,7.475 45.839,7.807 59.182,8.255 45.249,8.886 53.22,9.001 49.575,9.274 58.305,10.45 60.356,10.45 49.086,10.785 56.511,11.473 53.552,11.599 63.152,12.316 51.308,12.954 45.299,13.503 52.451,14.859 45.31,15.712 66.234,17.372 51.867,17.612 65.679,19.634 64.84,20.871 41.748,21.863 66.556,22.61 54.371,23.099 57.339,24.793 44.184,25.906 57.445,26.635 43.35,26.68 44.704,26.924 43.741,27.117 51.476,27.963 55.135,28.063 50.647,28.669 63.616,28.874 49.871,29.373
  other v6: 14.375,3.454 24.535,3.454 38.505,3.454 39.775,3.454 15.621,5.124 10.189,6.622 14.369,6.687 24.529,6.687 8.632,7.868 8.635,11.681 8.635,16.761 10.198,18.013 21.997,28.665 25.807,28.665 29.617,28.665 30.887,28.665 11.856,30.227 15.618,30.227 20.753,30.219 21.99,31.899 25.8,31.899 29.61,31.899 30.88,31.899
  other v7: 37.677,0.706 36.59,0.775 19.595,2.657 1.6,6.6 5.6,6.6 7.6,6.6 2.6,8.6 4.6,8.6 6.6,8.6 67.484,10.41 5.6,10.6 7.6,10.6 68.605,12.442 6.6,16.6 5.6,18.6 68.567,19.017 68.6,20.6 1.6,22.6 2.6,24.6 8.6,24.6 7.6,26.6 9.6,26.6 8.6,28.6 69.298,28.931 7.6,30.6 9.6,30.6 8.6,32.6 10.6,32.6 16.6,32.6 18.6,32.6 20.6,32.6
  other v8: 7.6,2.6 13.6,2.6 17.6,2.6 68.6,8.6 4.623,12.578 3.175,12.7 3.725,12.7 5.238,13.084 5.788,13.084 6.338,13.084 6.888,13.084 7.438,13.084 3.435,13.15 8.022,13.312 8.572,13.312 4.699,15.24 5.166,15.621 5.716,15.621 6.266,15.621 6.816,15.621 3.091,15.663 3.641,15.663 4.191,15.663 8.18,16.092 7.366,16.171 51.6,30.6 46.6,32.6
  other v9: 43.016,13.143 58.382,14.18 58.293,14.571 58.723,14.571 57.285,29.491
  other v10: 56.775,5.791 57.68,6.059 57.83,6.768 58.743,7.689 57.145,8.075 58.436,8.232 57.972,8.437
  other v11: 33.6,6.6 35.6,6.6 54.728,20.191 50.6,20.6 53.269,21.718 49.6,22.6 37.6,26.6 39.6,26.6
  other v13: 46.228,26.797
  other v15: 56.404,19.328 57.404,19.328 58.404,19.328 56.404,20.328 57.404,20.328 58.404,20.328 56.404,21.328 57.404,21.328 58.404,21.328 56.404,22.328 57.404,22.328 58.404,22.328
  other v20: 43.708,31.747 29.407,33.431 38.484,33.675 41.348,33.797
  other v22: 61.61,29.899 64.22,29.965 64.754,29.972
  other v24: 46.736,16.764 46.228,19.05